# Altium PCB PCB_Receiver.PcbDoc
Units mm, origin at the board's own origin, x right, y up, seen from the top; angles counter-clockwise.
Board outline 32.05 x 43.73 mm, 2 copper layers (Top Layer, Bottom Layer); 10 components, 13 nets, 52 pads, 6 vias.
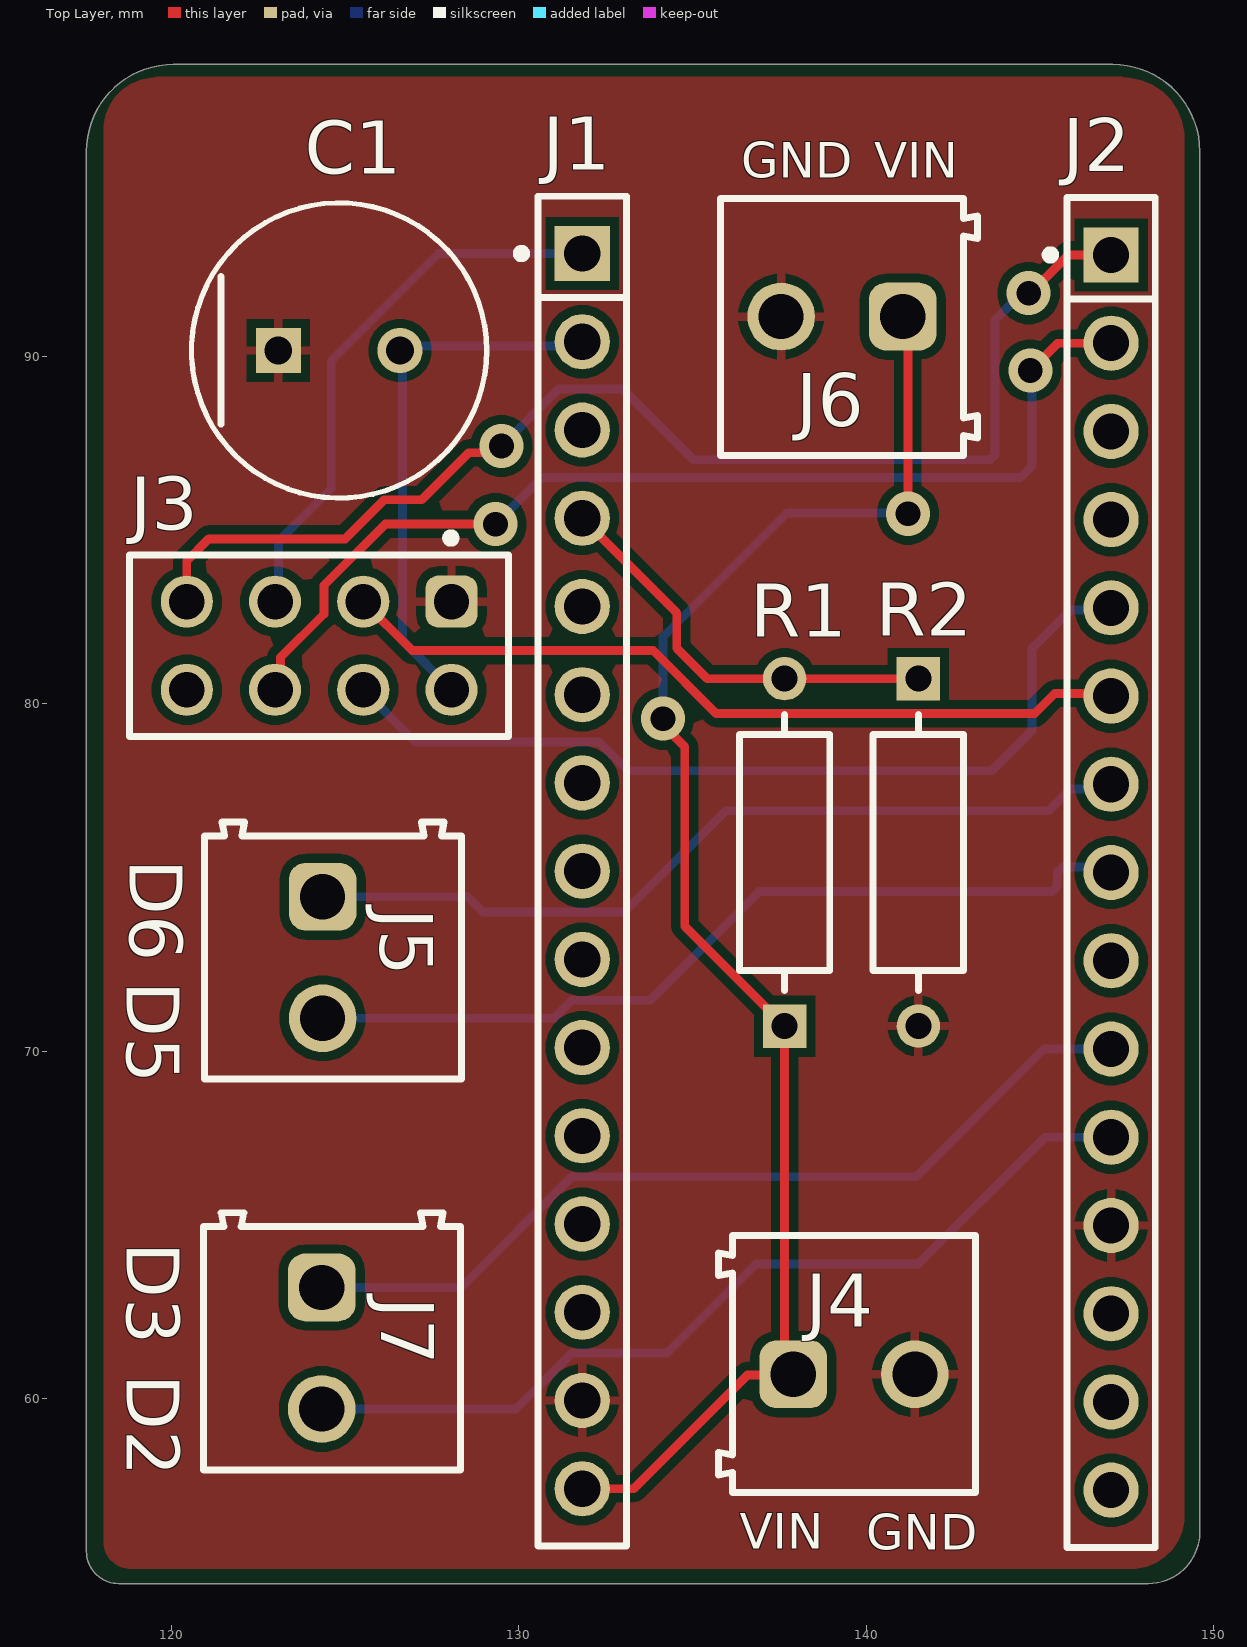
[diagram p0: Top Layer view]
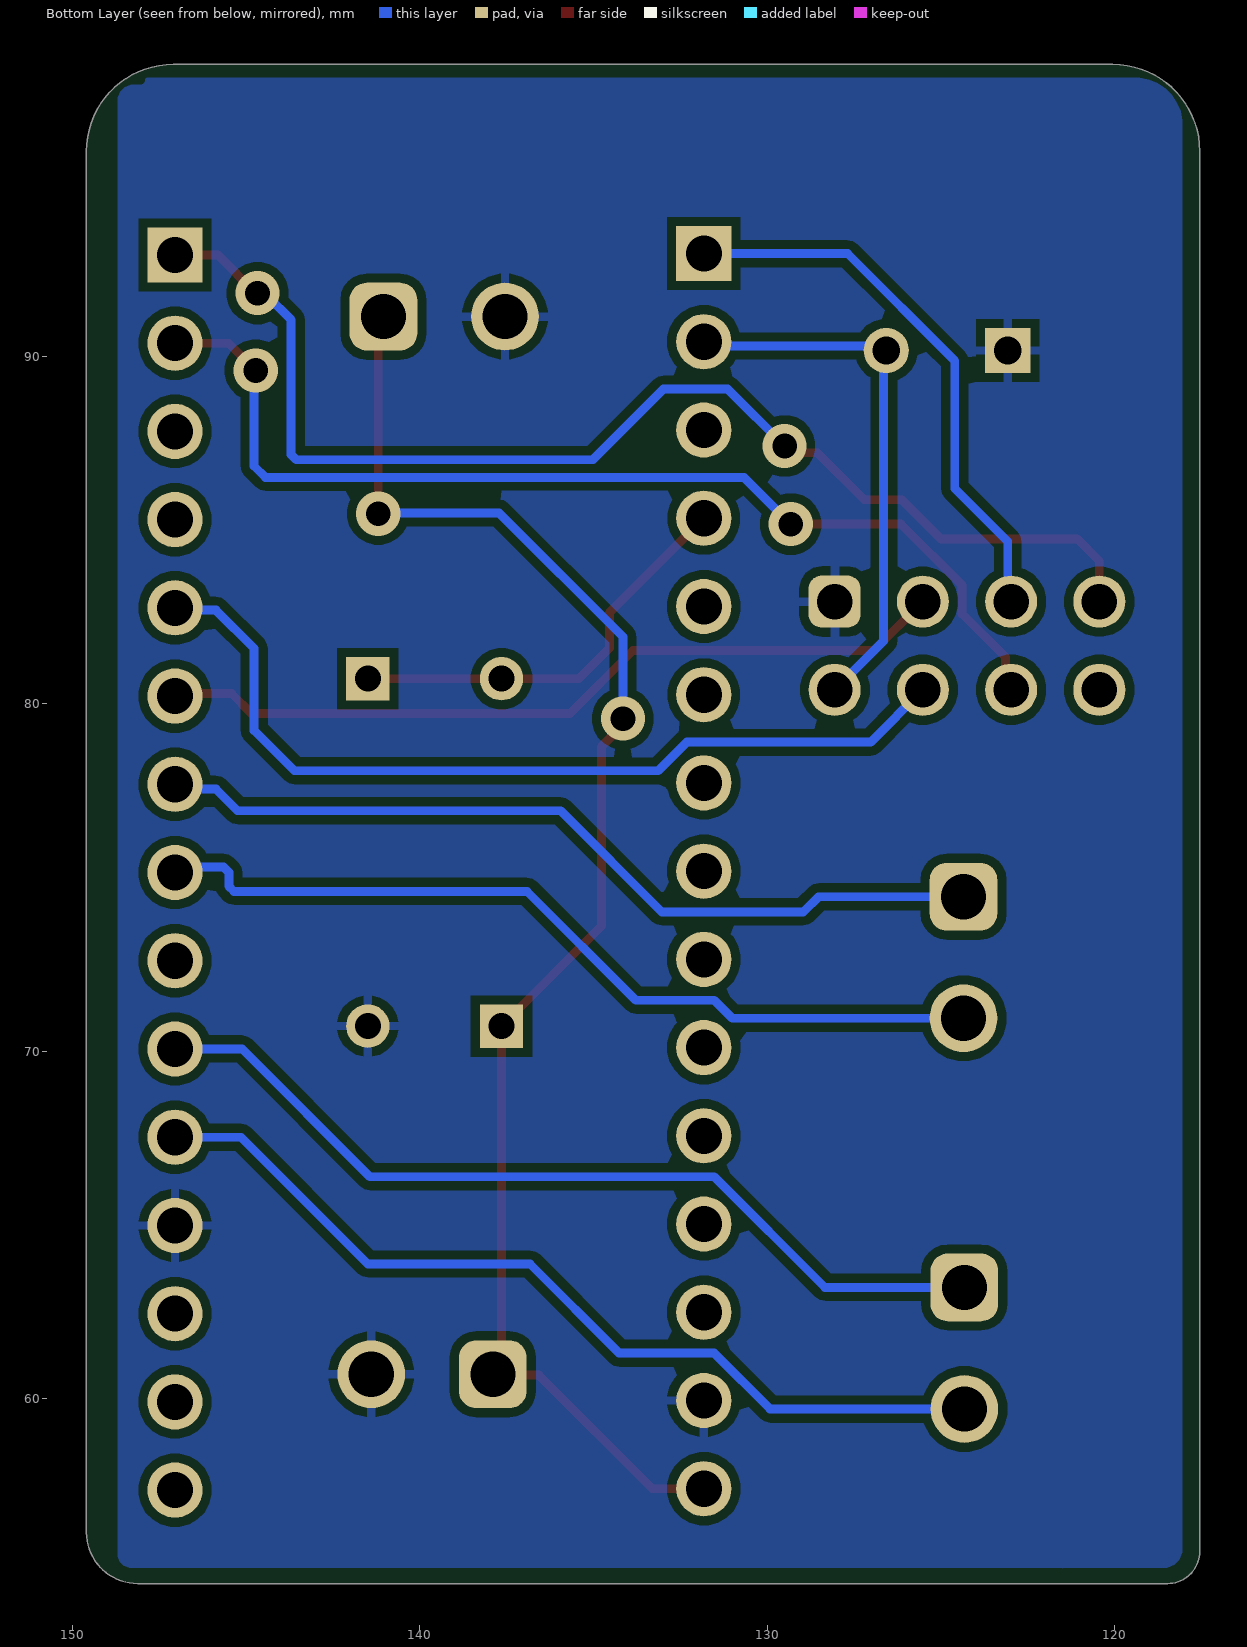
[diagram p1: Bottom Layer view, seen from below]
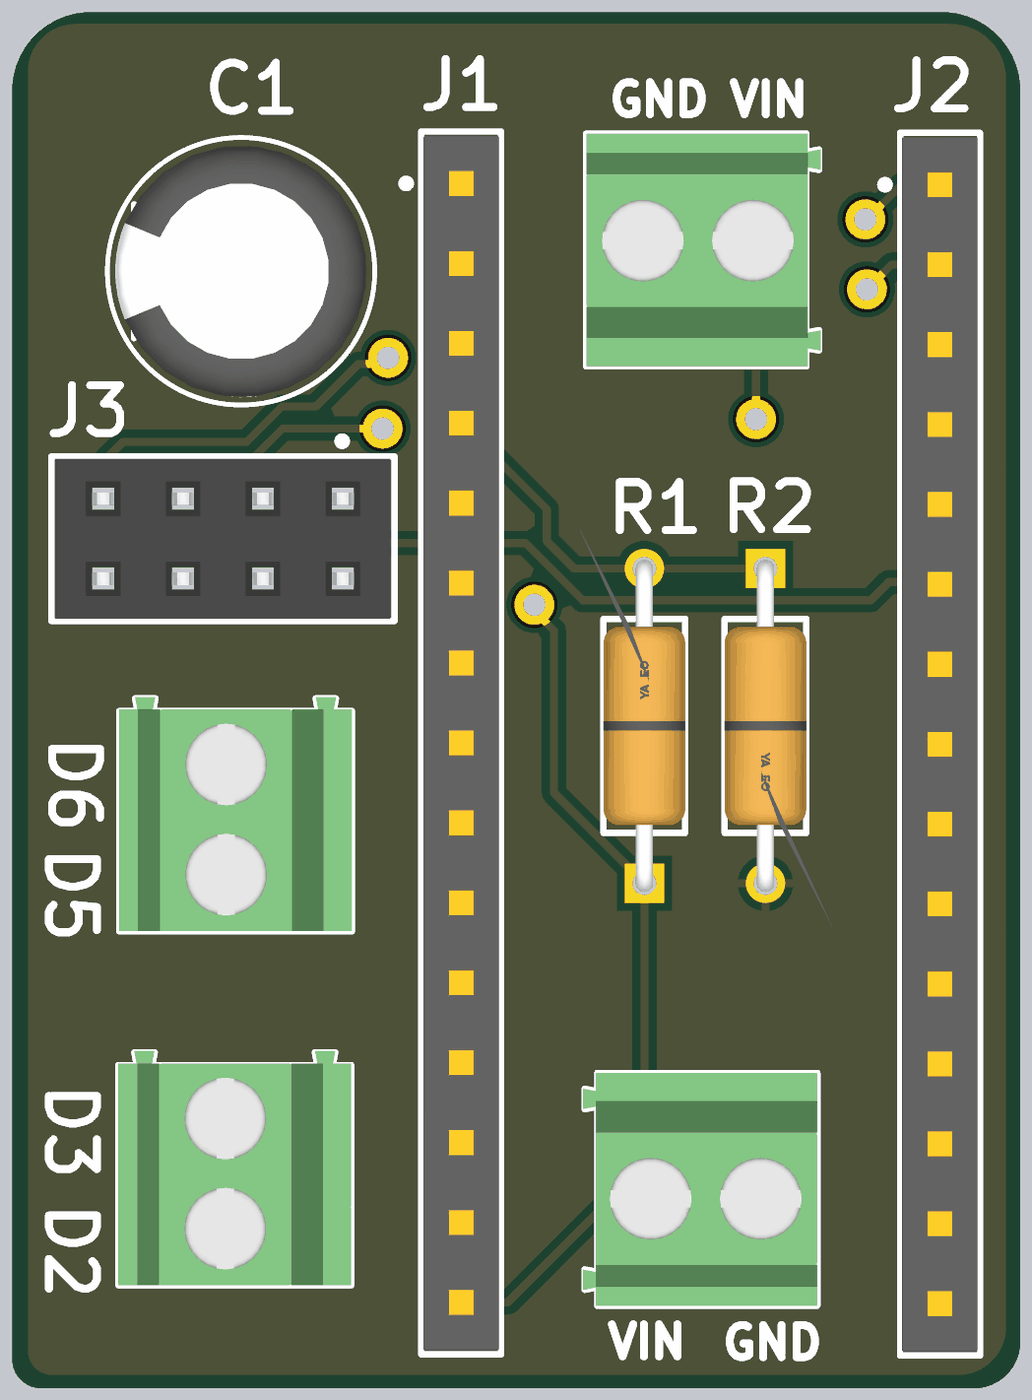
[diagram p2: 3D render of the assembled board from above, using the file's embedded part models]

## Layer stack, top to bottom
Top Solder: solder mask 0.0102, Solder Resist, Dk 3.5
Top Layer: signal copper 0.0356
Dielectric 1: dielectric 0.32, FR-4, Dk 4.8
Bottom Layer: signal copper 0.0356
Bottom Solder: solder mask 0.0102, Solder Resist, Dk 3.5

## Board outline
117.55,55.6 ccw(c118.475,55.6) 118.475,54.675 148.125,54.675 ccw(c148.125,56.15) 149.6,56.15 149.6,95.91 ccw(c147.101,95.91) 147.101,98.409 124.475,98.409 120.049,98.409 ccw(c120.049,95.91) 117.55,95.91

## Design rules (kind name [scope] priority, off if disabled: settings)
Clearance [All] p1: gap=0.254 ignorepadtopadclearanceinfootprint=FALSE
PolygonConnect [All] p1: connectstyle=Relief reliefconductorwidth=0.254 reliefentries=4 polygonreliefangle="90 Angle" airgapwidth=0.254
RoutingVias [All] p1: holewidth=0.711 width=1.27 viastyle="Through Hole" minholewidth=0.711 minwidth=1.27 maxholewidth=0.711 maxwidth=1.27
SolderMaskExpansion [All] p1: expansion=0.102 istentingtop=FALSE
SupplyNets "Schematic Supply Nets_2" [InNet('+3V3')] p1: voltage=0.000
SupplyNets "Schematic Supply Nets_1" [InNet('VIN')] p2: voltage=0.000
SupplyNets "Schematic Supply Nets" [InNet('GND')] p3: voltage=0.000
Width [All] p1: maxlimit=0.254 minlimit=0.254 preferedwidth=0.254
30 further rules are at their usual default settings.

## Components (designator, comment, footprint, x,y, rotation, side; value= is the part's Value field where it differs from the comment)
C1 "100uF 50V" FP-EEU-FR1H101B-MFG 124.825,90.175 r0 top
J1 "SSW-115-01-T-S" FP-SSW-115-01-T-S-MFG 131.825,75.185 r270 top locked
J2 "SSW-115-01-T-S" FP-SSW-115-01-T-S-MFG 147.05,75.145 r270 top locked
J3 "nRF24 Header" 61300821821 124.25,81.675 r180 top
J4 "Battery Connector" 691214110002 139.65,61 r0 top
J5 "Motor 5,6" 691214110002 124.65,72.7 r270 top
J6 "Charging Module" 691214110002 139.3,90.85 r180 top
J7 "Motor 2,3" 691214110002 124.625,61.45 r270 top
R1 "" FP-ZOR-25-R-52-0R-MFG 137.65,75.725 r90 top
R2 "2x 10KR" FP-ZOR-25-R-52-0R-MFG 141.5,75.725 r270 top

## Footprints (in the part's own frame and the unit in brackets; to place one, negate y for a bottom-side part, rotate by r counter-clockwise, add the part's x,y. Pads: shape width x height; smd on the part's side, far side on the other; paste and mask are expansions set on the pad)
61300821821 [mm] "Socket Header, Pitch 2.54 mm, THT, Vertical, dual row, 8p"
  rrect50% 1.5x1.5 hole 1.02: 1(-3.81,-1.27)
  round 1.5 hole 1.02: 2(-3.81,1.27) 3(-1.27,-1.27) 4(-1.27,1.27) 5(1.27,-1.27) 6(1.27,1.27) 7(3.81,-1.27) 8(3.81,1.27)
  silkscreen extent -5.46,-3.22 5.46,2.62, body extent -5.33,-2.54 5.33,2.54, height 8.45
691214110002 [mm] "3.50 mm Horizontal Entry Modular, 2p"
  rrect50% 1.95x1.95 hole 1.3: 1(-1.75,-0.3)
  round 1.95 hole 1.3: 2(1.75,-0.3)
  silkscreen extent -3.9,-3.7 3.5,3.7, body extent -3.95,-3.7 3.5,3.7, height 8.55
FP-EEU-FR1H101B-MFG [mm]
  rect 1.3x1.3 hole 0.8 paste-2539.97 mask+0: 1(-1.75,0)
  round 1.3 hole 0.8 paste-2539.97 mask+0: 2(1.75,0)
  silkscreen extent -4.25,-4.25 4.25,4.25, body extent -4.35,-4.35 4.35,4.35, height 0.25
FP-SSW-115-01-T-S-MFG [mm]
  rect 1.59x1.59 hole 1.04 paste-2539.97 mask+0: 1(-17.78,0)
  round 1.59 hole 1.04 paste-2539.97 mask+0: 2(-15.24,0) 3(-12.7,0) 4(-10.16,0) 5(-7.62,0) 6(-5.08,0) 7(-2.54,0) 8(0,0) 9(2.54,0) 10(5.08,0) 11(7.62,0) 12(10.16,0) 13(12.7,0) 14(15.24,0) 15(17.78,0)
  silkscreen extent -19.43,-1.87 19.43,1.27, body extent -19.53,-1.37 19.53,1.37, height 0.25
FP-ZOR-25-R-52-0R-MFG [mm]
  rect 1.25x1.25 hole 0.75 paste-2539.97 mask+0: 1(-5,0)
  round 1.25 hole 0.75 paste-2539.97 mask+0: 2(5,0)
  silkscreen extent -3.98,-1.3 3.98,1.3, body extent -5.72,-1.4 5.72,1.4, height 0.25

## Part data
C1: library part CMP-05427-000020-1, "CAP ALUM 100UF 20% 50V RADIAL", Capacitance=100uF, Case/Package=Radial, ESR (Equivalent Series Resistance)=61mR, Max Operating Temperature=105°C, Min Operating Temperature=-40°C, Package Quantity=1, Ripple Current=870mA, Tolerance=20%, Voltage Rating=50V, Contact Plating=Tin, Diameter=8mm, Features="General Purpose", Height=11.5mm, Height - Seated (Max)=0.512inch, Impedance=61mR, Lead Diameter=0.6mm, Lead Free="Lead Free", Lead Pitch=5mm, Length=11.5mm, Life (Hours)=6000Hour, Mount="Through Hole", Packaging="Tape and Reel", Radiation Hardening=No, REACH SVHC="No SVHC", RoHS Compliant=Yes, Series=FR, Termination=Radial, Voltage Rating (DC)=50V
J1 J2: library part CMP-02766-001723-1, "CONN RCPT 15POS 0.1 TIN PCB", Color=Black, Contact Resistance=10mR, Max Current Rating=6.9A, Max Operating Temperature=105°C, Max Voltage Rating (AC)=550V, Min Operating Temperature=-55°C, Connector Type=Receptacle, Contact Material=Bronze, Contact Plating=Tin, Contact Type="Female Socket", Depth=2.41mm, Gender=Receptacle, Housing Color=Black, Housing Material=Polymer, Lead Free="Lead Free", Length=38.61mm, Mating Cycles=100, Mount="Through Hole", Number of Contacts=15, Number of Positions=15, Number of Rows=1, Orientation=Straight, Packaging=Bulk, Pitch=0.1inch, Radiation Hardening=No, REACH SVHC="No SVHC", RoHS Compliant=Yes, Series=SSW, Termination=Solder, Width=2.41mm
J3: library part CMP-1502-01329-3, Contact Resistance=20mΩ, Current Rating=3A, Operating Supply Voltage=250V, Gender=Female, Lead Pitch=2.54mm, NexarPartId=61924725, Number of Pins=8, Orientation=Vertical, RoHS=Non-Compliant
J4 J5 J6 J7: library part CMP-1502-02464-2, Color="Blue, Green", Current=10A, Max Operating Temperature=105°C, Min Operating Temperature=-40°C, Voltage=300V, Contact Material=Brass, Contact Plating="Brass, Tin", Current Rating=10A, Height=8.7mm, Housing Material=Nylon, Lead Pitch=3.5mm, Length=7.4mm, Mount="Through Hole", NexarPartId=18818288, Number of Contacts=2, Number of Levels=1, Number of Pins=2, Number of Positions Per Level=2, Number of Rows=1, Packaging=Box, Pitch=3.5052mm, Plating="Brass, Steel", REACH SVHC=Unknown, RoHS=Compliant, Stripping Length=-6mm, Termination=Screw, Voltage Rating=300V, Width=7.9mm, Wire Gauge (Max)=24AWG, Wire Gauge (Min)=16AWG, Wire/Cable Gauge=24AWG
R1 R2: library part CMP-03413-000010-1, "RES 0 OHM JUMPER 1/4W AXIAL", Case/Package=Axial, Max Operating Temperature=155°C, Max Power Dissipation=250mW, Min Operating Temperature=-55°C, Package Quantity=5000, Resistance=0mR, Resistor Type="Carbon Film", Temperature Coefficient=100ppm/°C, Tolerance=5%, Construction=Cylindrical, Lead Free="Lead Free", Length=0.248inch, Military Standard=Not, Number of Terminations=2, Packaging="Tape and Reel", Power Rating=250mW, RoHS Compliant=Yes, Series=ZOR, Termination=Axial

## Via types
v1: diameter 1.27, hole 0.711, Top Layer to Bottom Layer, 6 vias

## Nets (pads, with @x,y where several pads share a name; then routed paths per layer and width w, separated by ;. In a path a pad name is that pad's centre, name@x,y a point inside that pad or via, vN(x,y) a via of type N, cw(c..) or ccw(c..) an arc to the next point about the centre after c; other vN are vias at no path point)
+3V3: C1.2 J1.2 J3.2 | length 15.7
  Bottom Layer w0.254: J3.2 126.651,81.814 126.651,90.099 C1.2 126.7,90.3 131.7,90.3 J1.2
D2: J2.11 J7.2 | length 26
  Bottom Layer w0.254: J7.2 129.917,59.7 131.526,61.309 134.263,61.309 136.829,63.875 141.5,63.875 145.15,67.525 J2.11
D3: J2.10 J7.1 | length 25.6
  Bottom Layer w0.254: J7.1 128.337,63.2 131.526,66.389 141.439,66.389 145.115,70.065 J2.10
D5: J2.8 J5.2 | length 24.8
  Bottom Layer w0.254: J5.2 131.007,70.95 131.526,71.469 133.786,71.469 136.917,74.6 145.351,74.6 145.5,74.749 145.5,75.151 145.649,75.3 146.895,75.3 J2.8
D6: J2.7 J5.1 | length 24.4
  Bottom Layer w0.254: J5.1 128.521,74.45 128.962,74.009 133.034,74.009 135.95,76.925 145.25,76.925 145.874,77.549 146.914,77.549 J2.7
GND: C1.1 J1.14 J2.12 J3.1 J4.2 J6.2 R2.2
NetJ1_1: J1.1 J3.5 | length 16.1
  Bottom Layer w0.254: J3.5 123.075,83.04 123.075,84.675 124.6,86.2 124.6,89.875 127.69,92.965 J1.1
NetJ1_4: J1.4 R1.2 R2.1 | length 12.2
  Top Layer w0.254: J1.4 134.545,82.625 134.545,81.605 135.425,80.725 R1.2 R2.1
NetJ2_1: J2.1 J3.7 | length 35.4
  Top Layer w0.254: J3.7 120.44,84.115 121.075,84.75 125,84.75 126.125,85.875 127.2,85.875 128.556,87.231 129.131,87.231 129.325,87.425 v1(129.5,87.425) ; v1(144.675,91.825) 144.725,91.825 145.825,92.925 J2.1
  Bottom Layer w0.254: v1(129.5,87.425) 131.136,89.061 132.989,89.061 135.021,87.029 143.56,87.029 143.709,87.178 143.709,91.059 144.4,91.75 144.6,91.75 v1(144.675,91.825)
NetJ2_2: J2.2 J3.6 | length 30.8
  Top Layer w0.254: J3.6 123.138,80.563 123.138,81.338 124.389,82.589 124.389,83.413 126.151,85.175 v1(129.325,85.175) ; v1(144.725,89.6) 145.51,90.385 J2.2
  Bottom Layer w0.254: v1(129.325,85.175) 130.671,86.521 144.446,86.521 144.775,86.85 144.775,89.55 v1(144.725,89.6)
NetJ2_5: J2.5 J3.4 | length 25.8
  Bottom Layer w0.254: J3.4 127.024,78.901 132.312,78.901 133.14,78.073 143.61,78.073 144.775,79.238 144.775,81.6 145.874,82.699 146.984,82.699 J2.5
NetJ2_6: J2.6 J3.3 | length 23.1
  Top Layer w0.254: J3.3 126.929,81.536 133.866,81.536 135.683,79.719 144.844,79.719 145.425,80.3 146.975,80.3 J2.6
VIN: J1.15 J4.1 J6.1 R1.1 | length 44.5
  Top Layer w0.254: J1.15 133.305,57.405 136.575,60.675 137.875,60.675 J4.1 137.65,60.95 R1.1 134.775,73.6 134.775,78.763 134.15,79.388 v1(134.15,79.575) ; J6.1 141.2,91 v1(141.2,85.475)
  Bottom Layer w0.254: v1(134.15,79.575) 134.15,81.925 137.725,85.5 140.75,85.5 140.775,85.475 v1(141.2,85.475)
pads on no net: J1.3 J1.5 J1.6 J1.7 J1.8 J1.9 J1.10 J1.11 J1.12 J1.13 J2.3 J2.4 J2.9 J2.13 J2.14 J2.15 J3.8

## Polygon pours and split planes (outlines as drawn)
GND on Top Layer "GND_L01_P000" (solid, pour order 0): 119.55,98.05 147.375,98.05 cw(c147.375,98.025) 147.4,98.025 cw(c147.4,96.275) 149.15,96.275 149.15,56.625 cw(c147.625,56.625) 147.625,55.1 118.825,55.1 cw(c118.825,55.875) 118.05,55.875 118.05,96.525 cw(c119.55,96.525) 119.55,98.025
GND on Bottom Layer "GND_L02_P001" (solid, pour order 1): 119.402,98.025 147.843,98.025 cw(c147.843,97.958) 147.91,97.958 ccw(c148.042,97.958) 148.042,97.826 148.229,97.826 cw(c148.229,97.351) 148.703,97.351 148.703,55.547 cw(c148.282,55.547) 148.282,55.125 121.525,55.125 ccw(c121.525,55.1) 121.5,55.1 ccw(c121.47,55.1) 121.47,55.13 118.599,55.13 cw(c118.599,55.679) 118.05,55.679 118.05,96.673 cw(c119.402,96.673)

## Silkscreen, mask and mechanical layers (free items; w line width, h text height)
Top Overlay:
  text "GND" at 136.404,95.154 h1.02
  text "VIN" at 140.229,95.154 h1.02
  text "D6" at 118.804,75.521 h1.52 r270
  text "D5" at 118.704,72.021 h1.52 r270
  text "D3" at 118.704,64.496 h1.52 r270
  text "D2" at 118.704,60.696 h1.52 r270
  text "VIN" at 136.354,55.679 h1.02
  text "GND" at 140.004,55.654 h1.02
Mechanical 1:
  lines w0.254: 124.475,98.409 124.475,98.409 ; 124.475,98.409 120.049,98.409 ccw(c120.049,95.91) 117.55,95.91 117.55,55.6 ccw(c118.475,55.6) 118.475,54.675 148.125,54.675 ccw(c148.125,56.15) 149.6,56.15 149.6,59.675 149.6,95.91 ccw(c147.101,95.91) 147.101,98.409 124.475,98.409